# Altium PCB Load-Transient_Tool.PcbDoc
Units mm, origin at the board's own origin, x right, y up, seen from the top; angles counter-clockwise.
Board outline 69.98 x 49.4 mm, 2 copper layers (Top Layer, Bottom Layer); 42 components, 23 nets, 108 pads, 63 vias.
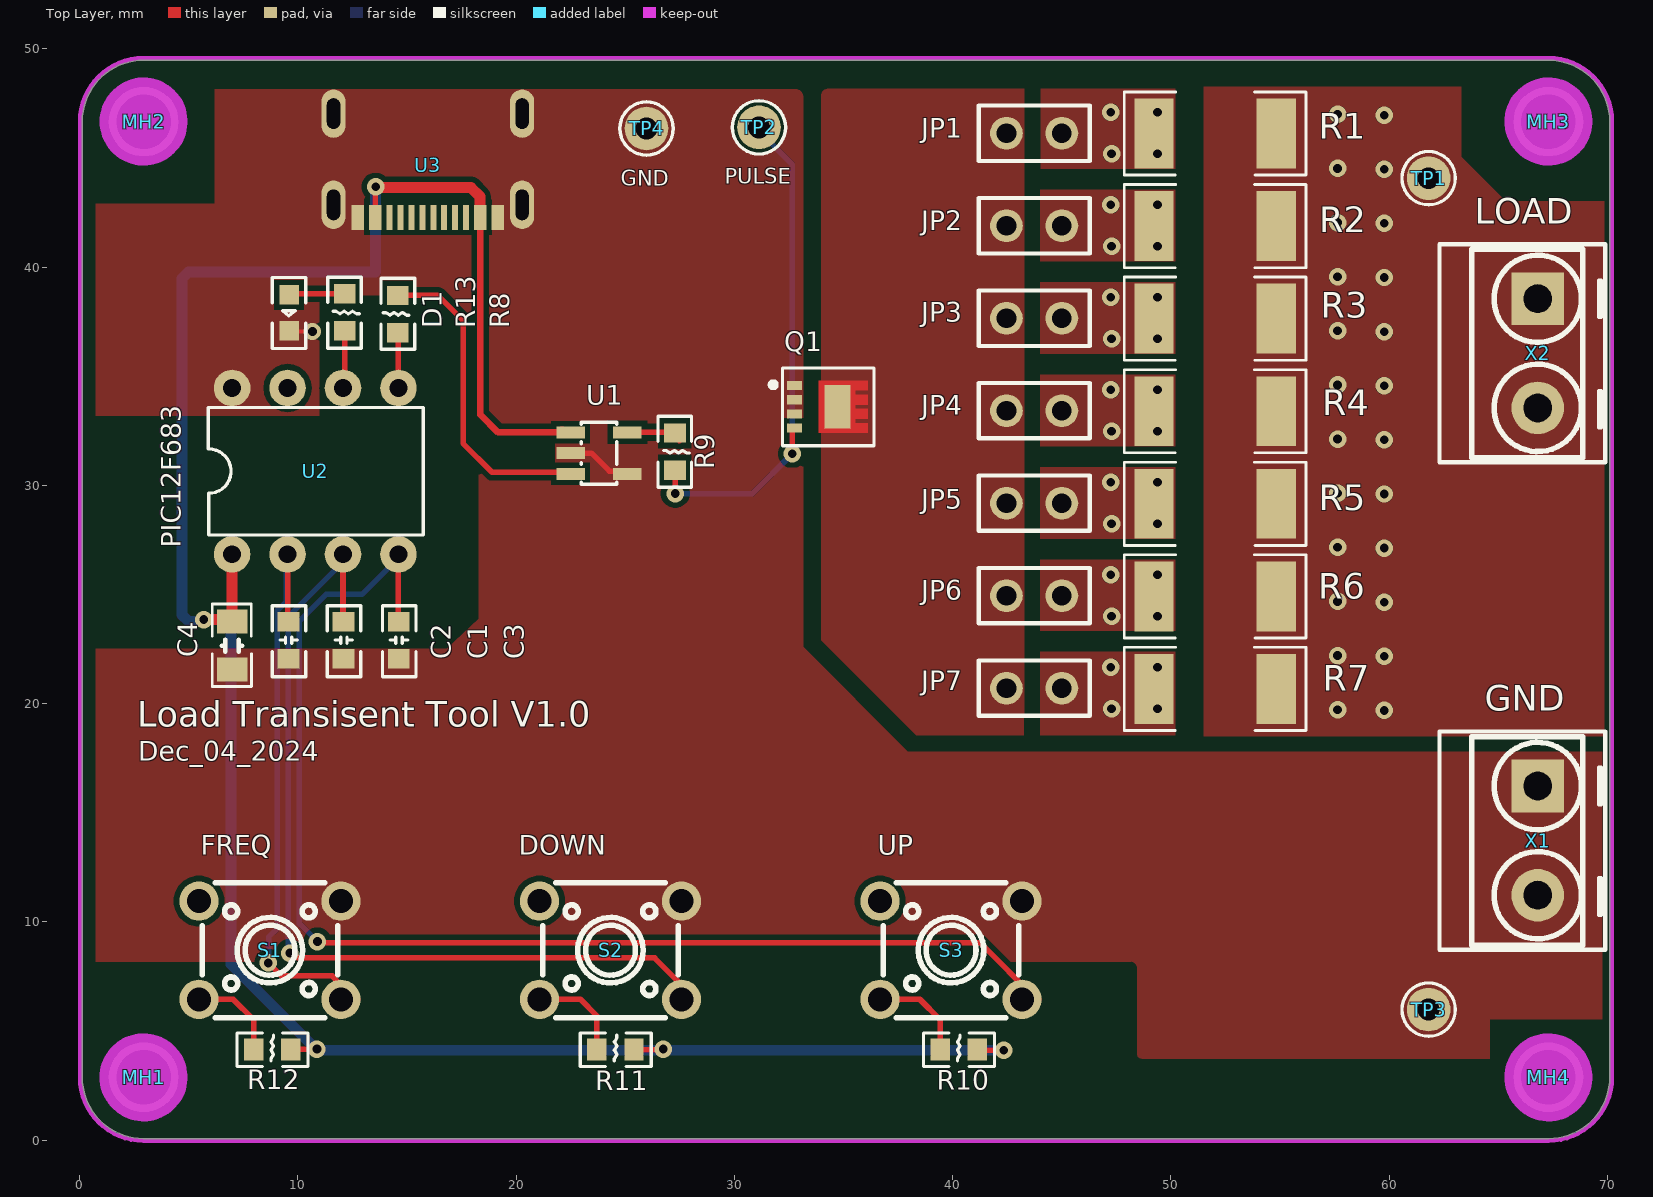
[diagram p0: Top Layer view]
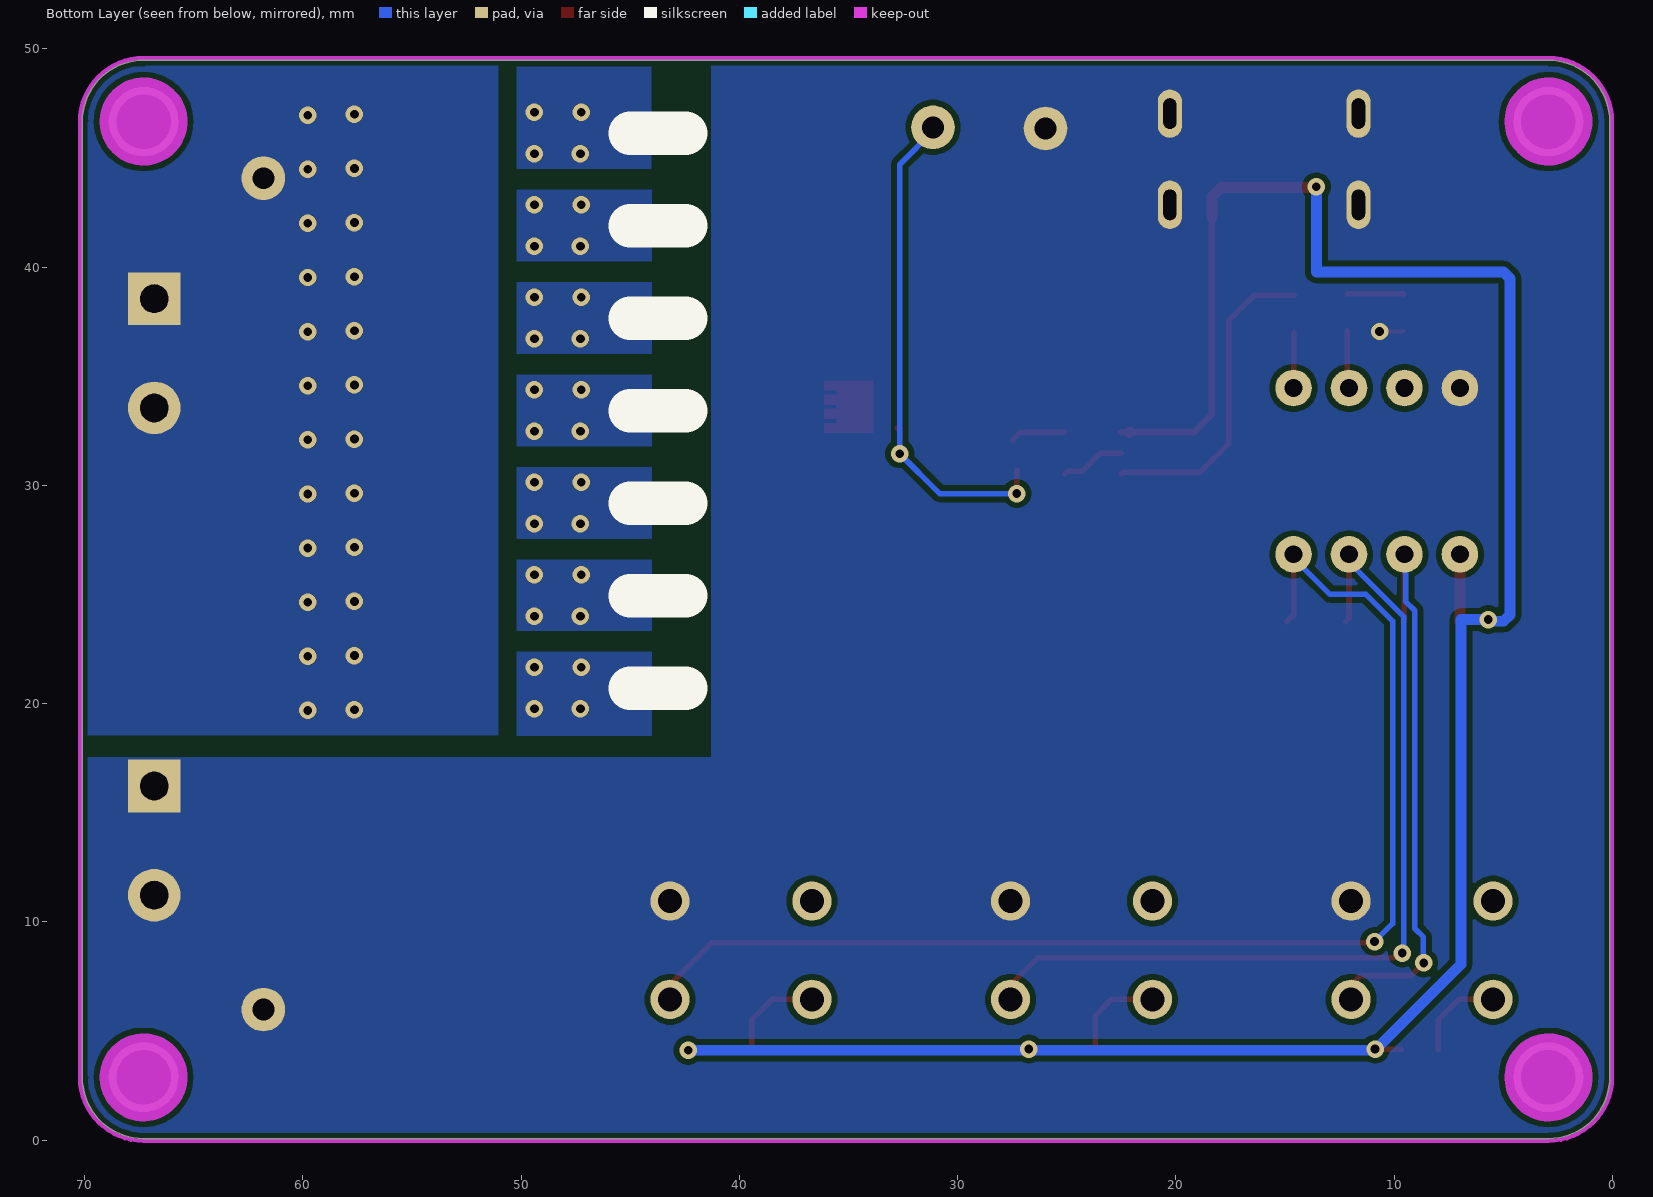
[diagram p1: Bottom Layer view, seen from below]
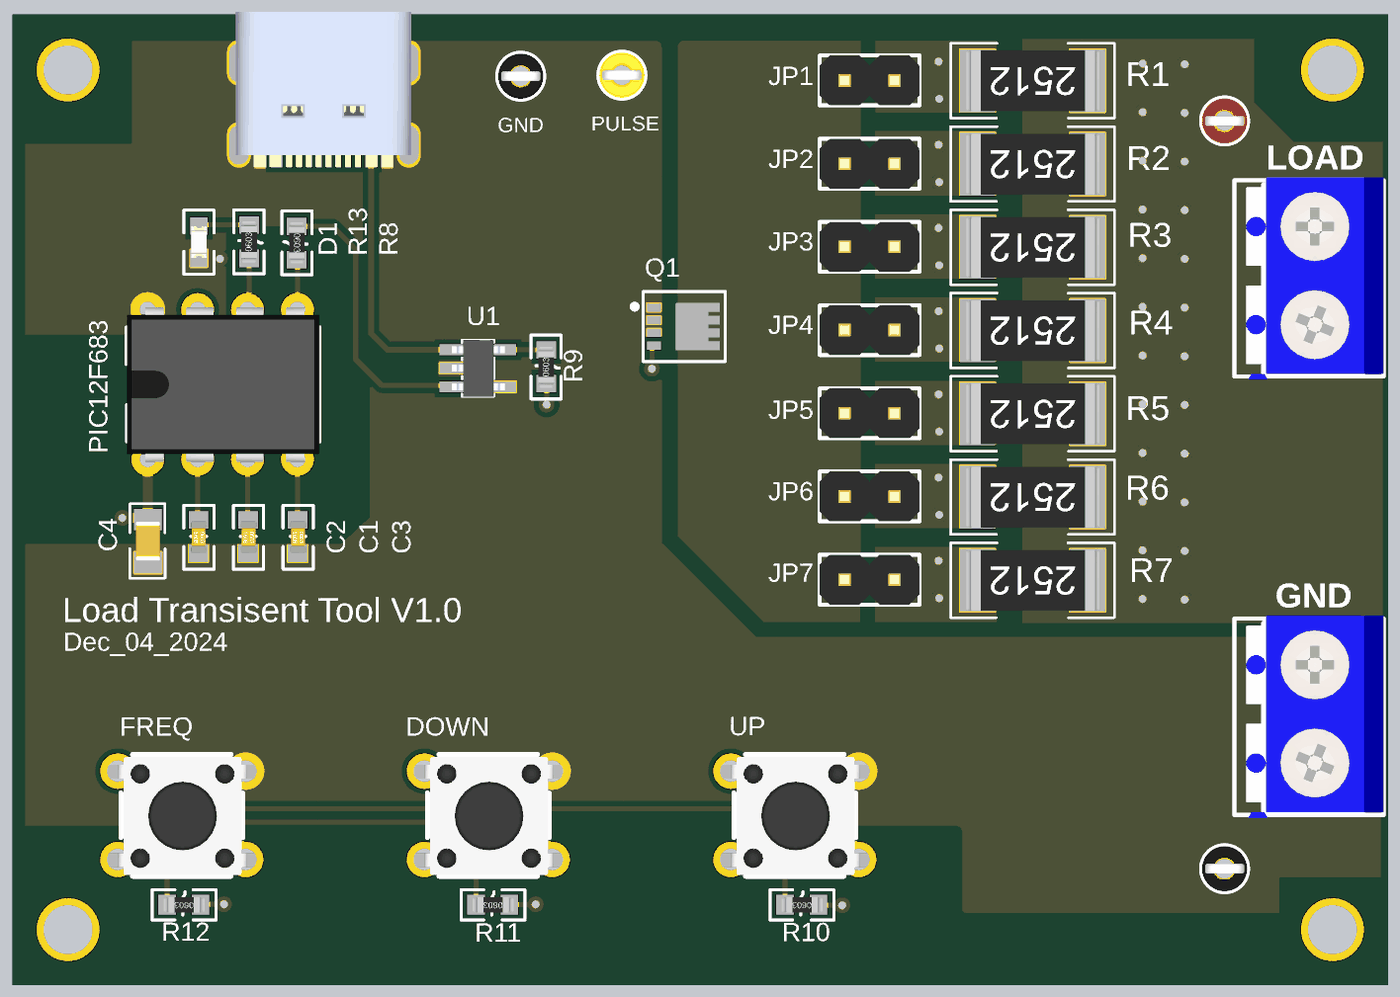
[diagram p2: 3D render of the assembled board from above, using the file's embedded part models]

## Layer stack, top to bottom
Top Solder: solder mask 0.0102, Solder Resist, Dk 3.5
Top Layer: signal copper 0.0356
Dielectric1: core 0.32, FR-4, Dk 4.8
Bottom Layer: signal copper 0.0356
Bottom Solder: solder mask 0.0102, Solder Resist, Dk 3.5

## Board outline
2.925,0.075 67.3,0.075 ccw(c67.3,2.875) 70.1,2.875 70.1,46.675 ccw(c67.3,46.675) 67.3,49.475 2.925,49.475 ccw(c2.925,46.675) 0.125,46.675 0.125,2.875 ccw(c2.925,2.875)

## Design rules (kind name [scope] priority, off if disabled: settings)
Clearance "Pad-Pad Clearance Same Net" [IsPad vs IsPad] p1 off: gap=0.1 ignorepadtopadclearanceinfootprint=FALSE except(0: Arc-Hole Track-Hole SMDPad-Hole THPad-Hole Via-Hole Fill-Hole Poly-Hole Region-Hole Text-Hole)
Clearance "General Clearance" [All] p2: gap=0.254 ignorepadtopadclearanceinfootprint=FALSE
ComponentClearance [All] p1 off: gap=0.2 collisioncheckmode=3 verticalgap=0.254 showdistances=FALSE
DiffPairsRouting [All] p1: maxlimit=0.127 minlimit=0.127 mostfreqgap=0.127 toplayer_minwidth=0.381 toplayer_maxwidth=0.381 toplayer_prefwidth=0.381 bottomlayer_minwidth=0.381 bottomlayer_maxwidth=0.381 bottomlayer_prefwidth=0.381 maxuncoupledlength=5.08
FabricationTestPointUsage TestPointUsage [All] p1 off: valid=0 allowmultiple=FALSE
FabricationTestpoint Testpoint [All] p1 off: side=3 testpointundercomponent=TRUE minsize=1.016 maxsize=2.54 preferedsize=1.524 minholesize=0 maxholesize=1.016 preferedholesize=0.813 testpointgrid=0.025 allowsidetop=TRUE allowsidebottom=TRUE usegrid=TRUE gridtolerance=0
HoleSize [All] p1: absolutevalues=TRUE maxlimit=5.2 minlimit=0.2 maxpercent=80.000 minpercent=20.000
MatchedLengths DiffPair_MatchedLengths [(IsDifferentialPair And (Name = 'DIFF_RX1'))] p1: tolerance=25.4 checknetsindiffpair=TRUE checkdiffpairvsdiffpair=FALSE checkxsignals=FALSE checkothers=FALSE
MinimumAnnularRing [All] p1: minimumring=0.12
PlaneClearance [All] p1: clearance=0.3
PlaneConnect [All] p1: planeconnectstyle=Direct reliefexpansion=0.5 reliefentries=4 reliefconductorwidth=0.25 reliefairgap=0.25
PolygonConnect [IsPAD] p1: connectstyle=Direct reliefconductorwidth=0.3 reliefentries=4 polygonreliefangle="90 Angle" airgapwidth=0.254
RoutingLayers [All] p1: top layer_v5=FALSE bottom layer_v5=FALSE
RoutingVias [All] p1: holewidth=0.3 width=0.6 viastyle="Through Hole" minholewidth=0.3 minwidth=0.6 maxholewidth=0.5 maxwidth=0.9
ShortCircuit ShortCircuit_1 [Net = 'No Net' vs Net = 'No Net'] p1: allowed=TRUE
ShortCircuit [All] p2: allowed=FALSE
SilkToSolderMaskClearance SilkscreenOverComponentPads [IsPad] p1: minsilkscreentomaskgap=0.254 clearancetoexposedcopper=TRUE
SolderMaskExpansion SolderMaskExpansion_Vias [IsVia] p1: expansion=-0.65 istentingtop=FALSE
SolderMaskExpansion [All] p2: expansion=0.051 istentingtop=FALSE
SupplyNets "Schematic Supply Nets_1" [InNet('GND')] p1: voltage=0.000
SupplyNets "Schematic Supply Nets" [InNet('5VDD')] p2: voltage=0.000
Width [All] p1: maxlimit=2.5 minlimit=0.127 preferedwidth=0.127
20 further rules are at their usual default settings.

## Components (designator, comment, footprint, x,y, rotation, side; value= is the part's Value field where it differs from the comment)
C1 "4.7nF" C0603 12.1,22.9 r270 top
C2 "4.7nF" C0603 9.575,22.9 r270 top
C3 "4.7nF" C0603 14.625,22.9 r270 top
C4 "N.C" C0805 6.975,22.675 r270 top
D1 "LED" CHIPLED_0603 9.6,37.9 r180 top
JP1 "Jumper, 2-Pin" JUMPER-2PIN 42.474,46.125 r0 top
JP2 "Jumper, 2-Pin" JUMPER-2PIN 42.474,41.888 r0 top
JP3 "Jumper, 2-Pin" JUMPER-2PIN 42.474,37.651 r0 top
JP4 "Jumper, 2-Pin" JUMPER-2PIN 42.474,33.414 r0 top
JP5 "Jumper, 2-Pin" JUMPER-2PIN 42.474,29.177 r0 top
JP6 "Jumper, 2-Pin" JUMPER-2PIN 42.474,24.939 r0 top
JP7 "Jumper, 2-Pin" JUMPER-2PIN 42.474,20.702 r0 top
MH1 "MOUNTING_HOLE_2MM" MOUNTINGHOLE_2.5_PLATED 2.933,2.883 r0 top
MH2 "MOUNTING_HOLE_2MM" MOUNTINGHOLE_2.5_PLATED 2.933,46.667 r0 top
MH3 "MOUNTING_HOLE_2MM" MOUNTINGHOLE_2.5_PLATED 67.292,46.667 r0 top
MH4 "MOUNTING_HOLE_2MM" MOUNTINGHOLE_2.5_PLATED 67.292,2.883 r0 top
Q1 "TPH3R704PL,L1Q" POWERDI3333-8_L3.3-W3.3-P0.65-BL 33.725,33.6 r270 top
R1 "0.5Ω" R2512 52.025,46.117 r180 top
R2 "1Ω" R2512 52.025,41.877 r180 top
R3 "2.2Ω" R2512 52.025,37.637 r180 top
R4 "3.3Ω" R2512 52.025,33.396 r180 top
R5 "4.7Ω" R2512 52.025,29.156 r180 top
R6 "10Ω" R2512 52.025,24.915 r180 top
R7 "22Ω" R2512 52.025,20.675 r180 top
R8 "470Ω" R0603 14.575,37.85 r270 top
R9 "47Ω" R0603 27.275,31.55 r90 top
R10 "4.7kΩ" R0603 40.275,4.15 r180 top
R11 "4.7kΩ" R0603 24.55,4.15 r180 top
R12 "4.7kΩ" R0603 8.825,4.15 r180 top
R13 "1kΩ" R0603 12.15,37.925 r90 top
S1 "DTSM-61-NR" KEY-TH_4P-L6.2-W6.2-P4.50-LS6.5 8.723,8.706 r180 top
S2 "DTSM-61-NR" KEY-TH_4P-L6.2-W6.2-P4.50-LS6.5 24.324,8.706 r180 top
S3 "DTSM-61-NR" KEY-TH_4P-L6.2-W6.2-P4.50-LS6.5 39.925,8.706 r180 top
TP1 "TP" TP_TH_1MM_RED 61.802,44.073 r0 top
TP2 "TP" TP_TH_1MM_YELLOW 31.125,46.401 r0 top locked
TP3 "TP" TP_TH_1MM_BLACK 61.802,5.985 r0 top
TP4 "TP" TP_TH_1MM_BLACK 25.975,46.35 r0 top locked
U1 "UCC27517DBVR" SOT23-5L 23.8,31.475 r270 top
U2 "PIC12F683" DIL08-ROUND 10.8,30.65 r0 top locked
U3 "USB C" USB_C_CUSB31-CFM2AX-01-X 15.955,45.822 r180 top
X1 "Terminal Block 3.5mmPitch: 3,5 mmNumber of pins: 2Created by Rembrandt Electronicswww.rembrandtelectronics.com" SCREWTERMINAL-5MM-2 66.8,16.225 r270 top
X2 "Terminal Block 3.5mmPitch: 3,5 mmNumber of pins: 2Created by Rembrandt Electronicswww.rembrandtelectronics.com" SCREWTERMINAL-5MM-2 66.8,38.55 r270 top

## Footprints (in the part's own frame and the unit in brackets; to place one, negate y for a bottom-side part, rotate by r counter-clockwise, add the part's x,y. Pads: shape width x height; smd on the part's side, far side on the other; paste and mask are expansions set on the pad)
C0603 [mm]
  rect 0.889x1 smd: 1(-0.85,0) 2(0.85,0)
  silkscreen extent -1.59,-0.75 1.66,0.79, body extent -0.77,-0.38 0.83,0.42, height 0.8
C0805 [mm]
  rect 1.1x1.4 smd: 1(-1.098,0.025) 2(1.102,0.025)
  silkscreen extent -1.89,-0.9 1.89,0.9, body extent -1,-0.6 1,0.65, height 0.85
CHIPLED_0603 [mil]
  rect 35x35 smd: A(0,-32.5) C(0,32.5)
  silkscreen extent -30,-64 31,64, body extent -16,-31 16,31, height 22
DIL08-ROUND [mil]
  round 65.98 hole 32: 1(-150,-150)
  oval 66x65.98 / inner round 65.98 / far side round 65.98 hole 32: 2(-50,-150) 3(50,-150) 4(150,-150) 5(150,150) 6(50,150) 7(-50,150) 8(-150,150)
  silkscreen extent -193,-115 195,115, body extent -192,-155 194,155, height 189
JUMPER-2PIN [mm]
  round 1.5 hole 0.9: 1(-0.011,0.007) 2(2.529,0.007)
  silkscreen extent -1.28,-1.26 3.8,1.28, body extent -1.28,-1.26 3.8,1.28, height 8.54
KEY-TH_4P-L6.2-W6.2-P4.50-LS6.5 [mm]
  round 1.8 hole 1.1: 1(3.251,-2.25) 2(-3.251,-2.25) 3(3.251,2.25) 4(-3.251,2.25)
  silkscreen extent -3.1,-3.1 3.1,3.1, body extent -3.99,-2.96 3.91,3.04, height 5
MOUNTINGHOLE_2.5_PLATED [mm] "MOUNTINGHOLE_2.5_PLATED"
  round 3.2 hole 2.5: MOUNT(0,0)
  Top Layer keep-out circle w2.032: c0,0 r1
  Top Layer keep-out circle w2.032: c0,0 r1
  Bottom Layer keep-out circle w2.032: c0,0 r1
  Bottom Layer keep-out circle w2.032: c0,0 r1
POWERDI3333-8_L3.3-W3.3-P0.65-BL [mm]
  rect 0.42x0.7 smd: 1(0.975,-0.97) 2(-0.975,-0.97) 2(-0.325,-0.97) 2(0.325,-0.97)
  rect 2x1.2 smd: 3(0,1)
  Top Layer region: -1.2,0.14 -1.2,2.39 -0.75,2.39 -0.75,1.8 -0.55,1.8 -0.55,2.39 -0.1,2.39 -0.1,1.8 0.1,1.8 0.1,2.39 0.55,2.39 0.55,1.8 0.75,1.8 0.75,2.39 1.2,2.39 1.2,0.14
  silkscreen extent -1.78,-2.07 1.78,2.67, body extent -1.43,-0.97 1.47,2.09, height 0.7
R0603 [mm]
  rect 0.889x1 smd: 1(-0.85,0) 2(0.85,0)
  silkscreen extent -1.64,-0.76 1.61,0.77, body extent -1.07,-0.39 1.03,0.41, height 0.5
R2512 [mm]
  rect 1.8x3.2 smd: 1(-2.8,0) 2(2.8,0)
  silkscreen extent -4.17,-1.91 4.17,1.91, body extent -3.43,-1.54 3.37,1.56, height 0.6
SCREWTERMINAL-5MM-2 [mil]
  rect 95x95 hole 51.18 slot 51.38 at 0 deg paste-99999 mask+2: 1(0,0)
  round 95 hole 51.18 slot 51.38 at 0 deg paste-99999 mask+2: 2(196.85,0)
  silkscreen extent -98,-177 295,122, body extent -104,-177 301,122, height 394
SOT23-5L [mm]
  rect 0.55x1.3 smd: 1(-0.95,-1.3) 2(0,-1.3) 3(0.95,-1.3) 4(0.95,1.3) 5(-0.95,1.3)
  silkscreen extent -1.42,-0.81 1.42,0.81, body extent -1.45,-1.33 1.45,1.37, height 1.45
TP_TH_1MM_BLACK [mm]
  round 2 hole 1: 1(0,0)
  silkscreen extent -1.22,-1.22 1.22,1.22, body extent -1.15,-1.15 1.15,1.15, height 5
TP_TH_1MM_RED [mm]
  round 2 hole 1: 1(0,0)
  silkscreen extent -1.22,-1.22 1.22,1.22, body extent -1.15,-1.15 1.15,1.15, height 5
TP_TH_1MM_YELLOW [mm]
  round 2 hole 1: 1(0,0)
  silkscreen extent -1.22,-1.22 1.22,1.22, body extent -1.15,-1.15 1.15,1.15, height 5
USB_C_CUSB31-CFM2AX-01-X [mm] "USB_C_CUSB31-CFM2AX-01-X"
  rect 0.575x1.15 smd: A1B12(-3.2,3.545) A4B9(-2.4,3.545) B1A12(3.2,3.545) B4A9(2.4,3.545)
  rect 0.275x1.15 smd: A5(-1.25,3.545) A6(-0.25,3.545) A7(0.25,3.545) A8(1.25,3.545) B5(1.75,3.545) B6(0.75,3.545) B7(-0.75,3.545) B8(-1.75,3.545)
  oval 1.108x2.216 hole 0.6 slot 1.4 at 90 deg: M1(-4.32,2.97) M2(4.32,2.97) M3(-4.32,-1.21) M4(4.32,-1.21)
  body extent -4.45,-3.8 4.49,4.1, height 3.18

## Part data
C1 C2 C3: library part Cap_0603, "Capacitor, X5R, ±10%, 6.3V", Manufacturer=N.A., Part Number=C0603-N.C., Volts=6.3V, Artikkelnr Noca=20069060, Artikkelnr Simpro=N.A., Footprint Doc=0603, LatestRevisionDate=2009-11-23, Manufacturer Part Number=N.A., Pin Count=2, Published=2009-05-08, Publisher="Nordic Semiconductor"
C4: library part Cap_0805, "Capacitor, X5R, ±10%, 6.3V", Manufacturer=N.A., Specification="X7R, ±10%, 16V"
D1: library part LEDCHIP-LED0603, "SMD lamp beads"
JP1 JP2 JP3 JP4 JP5 JP6 JP7: library part "Jumper, 2-Pin_TH"
MH1 MH2 MH3 MH4: library part MOUNTING_HOLE_2.5MM_PLATED
Q1: library part MOSFET-TPH3R704PL_1, "N Channel Mosfet 40V 92A dfn-8"
R1 R2 R3 R4 R5 R6 R7: library part Res_2512, "Resistor", Specification=±1%
R8 R9 R10 R11 R12 R13: library part Res_0603, "Resistor, ±1%, 0.100W", Manufacturer=N.A., Part Number=R0603-N.C.Ω, Artikkelnr Noca=N.A., Artikkelnr Simpro=N.A., Footprint Doc=0603, LatestRevisionDate=2009-05-08, Manufacturer Part Number=N.A., Note="Chip Res", Pin Count=2, Published=2009-05-08, Publisher="Nordic Semiconductor"
S1 S2 S3: library part "SW B3FS", "SPNA SMD Keyboard Switch"
TP1 TP2 TP3 TP4: library part TESTPAD_TH, "Testpoint, through hole", Part Number="Testpoint TH", Artikkelnr Noca=N.A., Artikkelnr Simpro=N.A., Footprint Doc=TESTPAD-TH, LatestRevisionDate=2009-12-12, Pin Count=1, Published=2009-12-12, Publisher="Nordic Semiconductor"
U1: "Gate Drive ICs ROHS", Name=UCC27517DBVR
U3: library part USB_C, "USB Type-C USB 2.0 Connector", DeviceSetName=USB_C, GateName_1=G$1, LibraryName=adafruit_connector, SymbolName_1=USB_C
X1 X2: library part SCREWTERMINAL-H2-5.0, GateName_1=-1, SymbolName_1=TERMINAL-BLOCK-PIN-3.5MM
U2: Name=PIC12F683

## Via types
v1: diameter 0.8, hole 0.4, Top Layer to Bottom Layer, tented both sides, 63 vias

## Nets (pads, with @x,y where several pads share a name; then routed paths per layer and width w, separated by ;. In a path a pad name is that pad's centre, name@x,y a point inside that pad or via, vN(x,y) a via of type N, cw(c..) or ccw(c..) an arc to the next point about the centre after c; other vN are vias at no path point)
5VDD: C4.1 R10.1 R11.1 R12.1 U1.1 U2.1 U3.A4B9 U3.B4A9 | length 112.5
  Top Layer w0.254: R12.1 9.7,4.175 v1(10.875,4.175) ; U3.B4A9@13.5,42.155 13.55,42.155 v1@13.55,43.475 ; R11.1@25.44,4.15 v1@26.74,4.15 ; R10.1@41.125,4.125 41.127,4.123 v1(42.341,4.123)
  Top Layer w0.3: U3.A4B9 18.355,33.245 19.175,32.425 22.125,32.425 U1.1
  Top Layer w0.5: v1(5.695,23.852) C4.1@6.99,23.852 ; U2.1 C4.1@6.99,23.852 ; C4.1 6.99,23.773 C4.1@6.99,23.852 ; v1(13.566,43.674) 13.59,43.65 17.925,43.65 18.347,43.228 18.347,42.285 U3.A4B9 ; U1.1@22.1,32.45 U1.1@22.125,32.425
  Bottom Layer w0.5: v1(13.566,43.674) 13.566,39.775 4.993,39.775 4.7,39.482 4.7,24.069 4.993,23.776 5.407,23.776 5.426,23.794 5.638,23.794 v1(5.695,23.852) 6.936,23.852 6.936,8.062 10.875,4.123 v1(42.341,4.123)
  other v1: 26.74,4.176
BTN1: C2.1 S1.4 U2.2 | length 27
  Top Layer w0.254: v1(8.652,8.123) 9.249,7.526 11.569,7.526 12.635,6.46 S1.4@12.735,6.46 ; U2.2 9.53,23.795 C2.1
  Bottom Layer w0.254: v1(8.652,8.123) 8.658,8.129 8.658,9.308 9.059,9.709 9.059,24.259 9.475,24.675 9.475,26.785 U2.2
BTN2: C1.1 S2.4 U2.3 | length 42.1
  Top Layer w0.254: v1(9.625,8.575) 9.773,8.575 9.998,8.35 26.346,8.35 28.236,6.46 S2.4@28.336,6.46 ; U2.3 12.07,23.905 C1.1@12.225,23.75
  Bottom Layer w0.145: U2.3@12.016,26.441 12.07,26.495 U2.3
  Bottom Layer w0.254: v1(9.625,8.575) 9.567,8.633 9.567,23.992 U2.3@12.016,26.441
BTN3: C3.1 S3.4 U2.4 | length 58.2
  Top Layer w0.254: v1@10.9,9.05 41.247,9.05 43.837,6.46 S3.4@43.937,6.46 ; C3.1@14.61,24.015 U2.4 ; C3.1@14.66,24.015 C3.1@14.925,23.75
  Bottom Layer w0.254: v1(10.9,9.1) 10.075,9.925 10.075,23.782 11.299,25.006 12.938,25.006 14.61,26.678 U2.4
GND: C1.2 C2.2 C3.2 C4.2 D1.C Q1.2 S1.2 S2.2 S3.2 TP3.1 TP4.1 U1.2 U1.4 U2.8 U3.A1B12 U3.B1A12 U3.M1 U3.M2 U3.M3 U3.M4 X1.1 X1.2 | length 4.1
  Top Layer w0.2: D1.C@9.575,37.075 9.601,37.049 v1(10.668,37.049)
  Top Layer w0.254: U1.2 23.45,31.475 24.272,30.653 24.972,30.653 U1.4
NetD1_A: D1.A R13.2 | length 2.6
  Top Layer w0.254: D1.A@9.575,38.775 9.575,38.726 9.625,38.775 R13.2
NetJP1_1: JP1.1 JP2.1 JP3.1 JP4.1 JP5.1 JP6.1 JP7.1 Q1.3
NetJP1_2: JP1.2 R1.2
  other v1: 47.277,45.195 49.384,45.195 47.244,47.093 49.384,47.093
NetJP2_2: JP2.2 R2.2
  other v1: 47.277,40.958 49.384,40.958 47.244,42.856 49.384,42.856
NetJP3_2: JP3.2 R3.2
  other v1: 47.277,36.721 49.384,36.721 47.244,38.619 49.384,38.619
NetJP4_2: JP4.2 R4.2
  other v1: 47.277,32.484 49.384,32.484 47.244,34.382 49.384,34.382
NetJP5_2: JP5.2 R5.2
  other v1: 47.277,28.247 49.384,28.247 47.244,30.145 49.384,30.145
NetJP6_2: JP6.2 R6.2
  other v1: 47.277,24.01 49.384,24.01 47.244,25.908 49.384,25.908
NetJP7_2: JP7.2 R7.2
  other v1: 47.277,19.773 49.384,19.773 47.244,21.671 49.384,21.671
NetQ1_1: Q1.1 R9.1 TP2.1 | length 24
  Top Layer w0.254: R9.1 27.289,30.686 v1(27.289,29.626) ; v1@32.546,31.554 v1(32.65,31.45) 32.65,32.625 Q1.1
  Bottom Layer w0.254: v1(27.289,29.626) 30.825,29.625 v1(32.65,31.45) 32.65,44.7 TP2.1@31.125,46.225
NetR1_1: R1.1 R2.1 R3.1 R4.1 R5.1 R6.1 R7.1 TP1.1 X2.1 X2.2
  other v1: 59.768,19.688 57.629,19.725 59.768,22.167 57.629,22.204 59.768,24.647 57.629,24.684 59.768,27.126 57.629,27.163 59.768,29.605 57.629,29.642 59.768,32.085 57.629,32.122 59.768,34.564 57.629,34.601 59.768,37.043 57.629,37.08 59.768,39.523 57.629,39.56 59.768,42.002 57.629,42.039 59.768,44.481 57.629,44.518 59.768,46.961 57.629,46.998
NetR8_1: R8.1 U1.3 | length 14.6
  Top Layer w0.254: R8.1 16.425,38.7 17.575,37.55 17.575,31.925 18.9,30.6 22.425,30.6 U1.3
NetR8_2: R8.2 U2.5 | length 2.6
  Top Layer w0.254: R8.2 14.61,36.965 U2.5
NetR9_2: R9.2 U1.5 | length 2.6
  Top Layer w0.254: U1.5 27.141,32.425 27.483,32.083 R9.2@27.483,32.042
NetR10_2: R10.2 S3.3 | length 5.3
  Top Layer w0.254: S3.3@35.927,6.46 38.49,6.46 39.425,5.525 R10.2@39.425,4.125
NetR11_2: R11.2 S2.3 | length 5.2
  Top Layer w0.254: S2.3@20.326,6.46 22.94,6.46 23.7,5.7 R11.2
NetR12_2: R12.2 S1.3 | length 5
  Top Layer w0.254: S1.3@4.725,6.46 7.04,6.46 7.975,5.525 R12.2
NetR13_1: R13.1 U2.6 | length 2.7
  Top Layer w0.254: U2.6 12.15,34.46 R13.1
pads on no net: MH1.MOUNT MH2.MOUNT MH3.MOUNT MH4.MOUNT S1.1 S2.1 S3.1 U2.7 U3.A5 U3.A6 U3.A7 U3.A8 U3.B5 U3.B6 U3.B7 U3.B8

## Polygon pours and split planes (outlines as drawn)
GND on Top Layer "NONET_L02_P-001" (solid, remove dead copper, pour order 20): 69.75,5.55 64.6,5.55 64.6,3.725 48.7,3.725 cw(c48.7,3.975) 48.45,3.975 48.45,7.875 ccw(c48.15,7.875) 48.15,8.175 0.75,8.175 0.75,22.525 16.825,22.525 18.3,23.9 18.3,31.2 18.925,30.575 21.8,30.575 21.8,32.45 21.775,32.425 19.175,32.425 18.35,33.25 18.35,36.775 16.424,38.701 10.975,38.701 10.975,33.2 0.75,33.2 0.75,42.9 6.2,42.9 6.2,48.15 32.8,48.15 cw(c32.8,47.8) 33.15,47.8 33.15,22.6 37.95,17.8 69.75,17.8
NetJP2_2 on Top Layer "NONET_L02_P-001" (solid, remove dead copper, pour order 31): 50.185,43.552 50.185,40.277 44.01,40.277 44.01,43.552
NetJP1_2 on Top Layer "NONET_L02_P-001" (solid, remove dead copper, pour order 30): 50.2,48.175 50.2,44.5 44.025,44.5 44.025,48.175
NetJP7_2 on Top Layer "NONET_L02_P-001" (solid, remove dead copper, pour order 29): 50.185,22.367 50.185,18.55 44.01,18.55 44.01,22.367
NetJP6_2 on Top Layer "NONET_L02_P-001" (solid, remove dead copper, pour order 28): 50.185,26.604 50.185,23.329 44.01,23.329 44.01,26.604
NetJP5_2 on Top Layer "NONET_L02_P-001" (solid, remove dead copper, pour order 27): 50.185,30.841 50.185,27.566 44.01,27.566 44.01,30.841
NetJP4_2 on Top Layer "NONET_L02_P-001" (solid, remove dead copper, pour order 26): 50.185,35.078 50.185,31.803 44.01,31.803 44.01,35.078
NetJP3_2 on Top Layer "NONET_L02_P-001" (solid, remove dead copper, pour order 25): 50.185,39.315 50.185,36.04 44.01,36.04 44.01,39.315
NetJP1_1 on Top Layer "NONET_L02_P-001" (solid, remove dead copper, pour order 19): 43.248,18.55 43.275,20.3 43.275,48.175 34.325,48.175 ccw(c34.325,47.82) 33.97,47.82 33.97,22.905 38.325,18.55
NetR1_1 on Top Layer "NONET_L02_P-001" (solid, remove dead copper, pour order 18): 70.1,18.5 70.1,30.932 70.1,43.014 65.336,43.014 63.3,45.05 63.3,48.25 51.5,48.25 51.5,18.5
NetJP7_2 on Bottom Layer "NONET_L02_P-001" (solid, remove dead copper, pour order 36): 50.185,22.367 50.185,18.527 44.01,18.527 44.01,22.367
NetJP6_2 on Bottom Layer "NONET_L02_P-001" (solid, remove dead copper, pour order 35): 50.185,26.604 50.185,23.329 44.01,23.329 44.01,26.604
NetJP5_2 on Bottom Layer "NONET_L02_P-001" (solid, remove dead copper, pour order 34): 50.185,30.841 50.185,27.566 44.01,27.566 44.01,30.841
NetJP4_2 on Bottom Layer "NONET_L02_P-001" (solid, remove dead copper, pour order 33): 50.185,35.078 50.185,31.803 44.01,31.803 44.01,35.078
NetJP3_2 on Bottom Layer "NONET_L02_P-001" (solid, remove dead copper, pour order 32): 50.185,39.315 50.185,36.04 44.01,36.04 44.01,39.315
NetJP2_2 on Bottom Layer "NONET_L02_P-001" (solid, remove dead copper, pour order 24): 50.185,43.552 50.185,40.277 44.01,40.277 44.01,43.552
NetJP1_2 on Bottom Layer "NONET_L02_P-001" (solid, remove dead copper, pour order 22): 50.2,49.181 50.2,44.5 44.025,44.5 44.025,49.181
NetR1_1 on Bottom Layer "NONET_L02_P-001" (solid, remove dead copper, pour order 23): 51.05,49.226 51.05,18.55 70,18.55 70,49.226
GND on Bottom Layer "NONET_L02_P-001" (solid, remove dead copper, pour order 21): 0.914,49.226 41.275,49.226 41.275,17.55 70,17.55 70,0.2 0.239,0.2 0.239,48.549 0.914,49.304

## Keep-outs
Keep-Out Layer:
  lines w0.2: 0.025,2.875 ccw(c2.925,2.875) 2.925,-0.025 ; 0.025,2.875 0.025,46.675 ; 0.025,2.875 0.025,2.875 ; 0.025,2.875 0.025,2.875 ; 0.025,46.675 cw(c2.925,46.675) 2.924,49.575 ; 0.025,46.675 0.025,46.675 ; 0.025,46.675 0.025,46.675 ; 2.924,49.575 cw(c2.925,49.475) 2.925,49.575 ; 2.924,49.575 cw(c2.925,46.675) 2.925,49.575 ; 2.925,-0.025 ccw(c2.925,0.075) 2.925,-0.025 ; 2.925,-0.025 ccw(c2.925,0.075) 2.925,-0.025 ; 2.925,-0.025 67.3,-0.025 ccw(c67.3,2.875) 70.2,2.874 ; 2.925,-0.025 2.925,-0.025 ; 2.925,-0.025 2.925,-0.025 ; 2.925,49.575 67.3,49.575 ; 67.301,49.575 ccw(c67.3,46.675) 67.3,49.575 ; 67.301,49.575 cw(c67.3,46.675) 70.2,46.676 ; 67.301,49.575 ccw(c67.3,49.475) 67.3,49.575 ; 70.2,2.874 ccw(c70.1,2.875) 70.2,2.875 ; 70.2,2.874 ccw(c67.3,2.875) 70.2,2.875 ; 70.2,2.875 70.2,46.675 ; 70.2,46.675 ccw(c70.1,46.675) 70.2,46.676 ; 70.2,46.675 ccw(c67.3,46.675) 70.2,46.676

## Silkscreen, mask and mechanical layers (free items; w line width, h text height)
Top Overlay:
  text "PULSE" at 29.563,43.578 h1.2
  text "GND" at 24.796,43.502 h1.2
  text "LOAD" at 63.908,41.603 h2
  text "PIC12F683" at 4.933,27.15 h1.52 r90
  text "GND" at 64.377,19.295 h2
  text "Load Transisent Tool V1.0" at 2.644,18.556 h2
  text "Dec_04_2024" at 2.69,17.086 h1.52
  text "UP" at 36.574,12.788 h1.52
  text "FREQ" at 5.56,12.771 h1.52
  text "DOWN" at 20.126,12.771 h1.52
Bottom Overlay:
  lines w2: 42.463,20.709 45.003,20.709 ; 42.463,24.946 45.003,24.946 ; 42.463,29.184 45.003,29.184 ; 42.463,33.421 45.003,33.421 ; 42.463,37.658 45.003,37.658 ; 42.463,41.895 45.003,41.895 ; 42.463,46.132 45.003,46.132
Bottom Solder:
  rectangle: 46.025,18.5 60.65,49.2
6. FabNotes:
  drawing of 709 lines, arcs and shapes, not listed
  text "NB2DSK-SPK01" at 155.04,133.672 h1.14
  text "DESIGN INFORMATION" at 98.801,133.652 h1.14
  text "BOARD NAME:" at 136.393,133.652 h1.14
  text "BOARD TECHNOLOGY" at 98.801,131.112 h1.14
  text "BOARD SIZE (REFER ALSO PROFILING INFORMATION)" at 147.061,131.112 h1.14
  text "10" at 100.922,128.923 h1.14
  text "269.6mm" at 149.781,128.838 h1.14
  text "10" at 114.6,128.75 h1.14
  text "74.6mm" at 172.781,128.738 h1.14
  text "10" at 128.57,128.623 h1.14
  text "X" at 165.73,128.064 h1.14
  text "(MIN. TRACK/   PADS  /   CLEARANCE     IN 0.001'')" at 97.277,126.032 h1.14
  text "MINIMUM ANNULAR RING 0.05MM (0.002'') EXTERNAL PER IPC-2221 CLASS 3 LEVEL C AND IS TH" at 98.801,123.492 h1.14
  text "MANUFACTURING REGISTRATION ALLOWANCE" at 98.801,121.206 h1.14
  text "LAND SIZE CALCULATION MINIMUM - NOMINAL HOLE SIZE + 0.508MM (0.020'')" at 98.801,118.412 h1.14
  text "X" at 136.393,114.094 h1.14
  text "X" at 154.173,114.094 h1.14
  text "CIRCUIT TYPE:" at 98.801,113.84 h1.14
  text "SS" at 121.661,113.84 h1.14
  text "DS" at 139.441,113.84 h1.14
  text "PTH" at 157.221,113.84 h1.14
  text "ML" at 168.143,113.84 h1.14
  text "No. of Layers" at 175.001,113.84 h1.14
  text "FINGER CONNECTOR DIM PER:" at 98.801,110.792 h1.14
  text "AS SHOWN" at 175.001,110.792 h1.14
  text "No. OFF TOTAL" at 115.565,107.998 h1.14
  text "ONE SIDE" at 157.221,107.998 h1.14
  text "BOTH SIDES" at 175.001,107.744 h1.14
  text "X" at 136.393,105.204 h1.14
  text "X" at 107.09,105.1 h1.14
  text "VIAS:" at 98.801,105.077 h1.14
  text "NONE" at 110.231,105.077 h1.14
  text "FEED THRU'" at 121.661,105.077 h1.14
  text "TENTED" at 139.441,105.077 h1.14
  text "BURIED LAYER SEQUENCE" at 157.221,105.077 h1.14
  text "X" at 118.486,102.156 h1.14
  text "UNIQUE DRILL" at 121.661,102.029 h1.14
  text "2 SIZE" at 139.441,102.029 h1.14
  text "BLIND LAYER SEQUENCE" at 157.221,102.029 h1.14
  text "Layer Stack Manager (PCB)" at 134.234,99.743 h1.14
  text "X" at 171.953,99.743 h1.14
  text "AS SHOWN" at 175.001,99.743 h1.14
  text "LAYER CONSTRUCTION PER:" at 98.801,99.616 h1.14
  text "Altium Designer 6.6" at 174.84,96.957 h1.14
  text "ARTWORK:" at 98.801,96.822 h1.14
  text "MANUAL" at 121.661,96.822 h1.14
  text "DIGITISED" at 139.441,96.822 h1.14
  text "X" at 154.173,96.822 h1.14
  text "CAD" at 157.221,96.822 h1.14
  text "TYPE" at 168.143,96.822 h1.14
  text "ARTWORK/PATTERN MASTER LIST" at 98.801,92.123 h1.14
  text "DESCRIPTION" at 100.071,89.71 h1.14
  text "DRAWING No./CAD FILE REF." at 118.74,89.71 h1.14
  text "LAYER NAME" at 160.015,89.71 h1.14
  text "GERBER FILE REF" at 180.767,89.634 h1.14
  text "PCB FILE" at 98.547,87.17 h1.14
  text "NB2DSK-SPK.PCBDOC" at 118.906,87.113 h1.14
  text "PcbDoc" at 150.16,87.094 h1.14
  text "Top Paste Mask" at 158.339,84.63 h1.14
  text "NB2DSK-SPK" at 119.033,84.573 h1.14
  text "GTP" at 151.34,84.581 h1.14
  text "GTP" at 200.96,84.554 h1.14
  text "GERBER FILE" at 98.547,84.503 h1.14
  text "GTO" at 151.34,82.081 h1.14
  text "GTO" at 200.909,82.065 h1.14
  text "NB2DSK-SPK" at 119.033,82.033 h1.14
  text "Top Overlay" at 158.339,82.039 h1.14
  text "GERBER FILE" at 98.547,81.963 h1.14
  text "Top Solder Mask" at 158.339,79.601 h1.14
  text "GTS" at 151.34,79.581 h1.14
  text "NB2DSK-SPK" at 119.033,79.493 h1.14
  text "GTS" at 200.96,79.474 h1.14
  text "GERBER FILE" at 98.547,79.423 h1.14
  text "TOP LAYER" at 158.339,77.01 h1.14
  text "NB2DSK-SPK" at 119.033,76.953 h1.14
  text "GTL" at 200.96,76.934 h1.14
  text "GERBER FILE" at 98.547,76.883 h1.14
  text "GTL" at 151.34,76.881 h1.14
  text "NB2DSK-SPK" at 119.033,69.46 h1.14
  text "BOTTOM LAYER" at 157.958,69.39 h1.14
  text "GBL" at 150.959,69.317 h1.14
  text "GBL" at 200.579,69.314 h1.14
  text "GERBER FILE" at 98.166,69.263 h1.14
  text "GBS" at 150.959,66.917 h1.14
  text "Bottom Solder Mask" at 157.958,66.901 h1.14
  text "NB2DSK-SPK" at 119.033,66.793 h1.14
  text "GBS" at 200.579,66.774 h1.14
  text "GERBER FILE" at 98.166,66.723 h1.14
  text "GBO" at 150.959,64.317 h1.14
  text "Bottom Overlay" at 157.958,64.31 h1.14
  text "NB2DSK-SPK" at 119.033,64.253 h1.14
  text "GBO" at 200.579,64.234 h1.14
  text "GERBER FILE" at 98.166,64.183 h1.14
  text "GBP" at 200.579,61.821 h1.14
  text "Bottom Paste Mask" at 157.958,61.77 h1.14
  text "NB2DSK-SPK" at 119.033,61.713 h1.14
  text "GBP" at 150.959,61.721 h1.14
  text "GERBER FILE" at 98.039,61.643 h1.14
  text "APERTURE LIST" at 98.547,41.457 h1.14
  text "APR" at 151.16,41.381 h1.14
  text "DRILL REPORT" at 98.547,38.917 h1.14
  text "DRR" at 151.16,38.841 h1.14
  text "DRILL FILE" at 98.281,36.31 h1.14
  text "DRL" at 151.035,36.166 h1.14
  text "TXT" at 150.881,33.76 h1.14
  text "EXCELLON DRILL" at 98.206,33.685 h1.14
  text "MATERIAL:" at 98.801,28.48 h1.14
  text "GLASS FIBRE EPOXY RESIN NEMA GRADE FR4-08 (IPC-4101) - WITH TG170" at 124.455,28.226 h1.14
  text "X" at 121.788,28.099 h1.14
  text "THICKNESS:" at 106.675,25.305 h1.14
  text "0.8mm" at 124.455,25.305 h1.14
  text "1.2mm" at 142.108,25.305 h1.14
  text "1.6mm" at 159.761,25.305 h1.14
  text "2.4mm" at 177.541,25.305 h1.14
  text "3.2mm" at 195.321,25.305 h1.14
  text "X" at 157.348,25.178 h1.14
  text "2" at 153.499,22.41 h1.14
  text "TOLERANCE:" at 106.548,22.257 h1.14
  text "OTHER +/-" at 177.541,22.257 h1.14
  text "X" at 121.788,22.13 h1.14
  text "IN A/W IPC-D-300G CLASS" at 125.001,22.057 h1.14
  text "2" at 153.499,19.31 h1.14
  text "BOW & TWIST:" at 106.535,19.209 h1.14
  text "AS SHOWN" at 177.668,19.082 h1.14
  text "IN A/W IPC-D-300G CLASS" at 125.001,19.009 h1.14
  text "X" at 121.788,18.955 h1.14
  text "COPPER THICKNESS (FINISHED)" at 104.099,16.21 h1.14
  text "18um" at 124.455,13.621 h1.14
  text "35um" at 151.506,13.621 h1.14
  text "70um" at 177.795,13.621 h1.14
  text "OUTER:" at 107.699,13.51 h1.14
  text "X" at 148.763,13.418 h1.14
  text "18um" at 124.455,10.573 h1.14
  text "35um" at 151.506,10.573 h1.14
  text "70um" at 177.795,10.573 h1.14
  text "INNER SIGNAL:" at 107.699,10.51 h1.14
  text "X" at 148.712,10.37 h1.14
  text "INNER PWR:" at 107.699,7.51 h1.14
  text "18um" at 124.455,7.525 h1.14
  text "35um" at 151.506,7.525 h1.14
  text "70um" at 177.795,7.525 h1.14
  text "X" at 148.839,7.398 h1.14
  text "STRUCTURE:" at 98.801,4.477 h1.14
  text "REFER" at 124.455,4.477 h1.14
  text "AS PER DRAWING No." at 124.328,1.302 h1.14
  text "AS SHOWN" at 177.668,1.302 h1.14
  text "X" at 175.128,1.175 h1.14
  text "DRILLING:" at 98.801,-1.492 h1.14
  text "COMPONENT SIDE" at 124.455,-3.778 h1.14
  text "SOLDER SIDE" at 151.252,-3.778 h1.14
  text "VIEWED FROM:" at 105.799,-3.99 h1.14
  text "X" at 121.788,-4.032 h1.14
  text "REFERENCE:" at 106.04,-6.826 h1.14
  text "AS SHOWN" at 124.328,-6.953 h1.14
  text "PATTERN MASTER LIST" at 151.379,-6.953 h1.14
  text "X" at 175.128,-6.953 h1.14
  text "NC_DRILL FILES" at 177.668,-6.953 h1.14
  text "X" at 121.788,-7.08 h1.14
  text "20um" at 151.506,-9.874 h1.14
  text "PTH MINIMUM COPPER THICKNESS:" at 106.099,-9.99 h1.14
  text "X" at 148.839,-10.001 h1.14
  text "OTHER" at 177.668,-10.001 h1.14
  text "NPTH:" at 105.999,-12.89 h1.14
  text "TENTED" at 124.328,-13.049 h1.14
  text "X" at 148.839,-13.049 h1.14
  text "PADS REMOVED" at 151.379,-13.049 h1.14
  text "REMOVE PADS" at 177.668,-13.049 h1.14
  text "X" at 121.788,-13.176 h1.14
  text "2nd DRILL" at 124.328,-16.097 h1.14
  text "BOTH" at 151.379,-16.097 h1.14
  text "AS SHOWN" at 163.698,-16.097 h1.14
  text "NONE" at 177.668,-16.097 h1.14
  text "BOARD FINISH:" at 98.801,-19.018 h1.14
  text "X" at 121.788,-19.145 h1.14
  text "ETCHING" at 124.328,-19.145 h1.14
  text "REFER PATTERN MASTER LIST" at 151.379,-19.145 h1.14
  text "LEGEND / SCREEN PRINT:" at 105.199,-22.09 h1.14
  text "NONE" at 132.801,-22.082 h1.14
  text "COMPONENT" at 151.376,-22.117 h1.14
  text "SOLDER" at 177.701,-22.182 h1.14
  text "X" at 148.836,-22.244 h1.14
  text "X" at 175.161,-22.309 h1.14
  text "WHITE" at 124.401,-24.982 h1.14
  text "COLOUR:" at 111.099,-25.09 h1.14
  text "X" at 121.861,-25.109 h1.14
  text "YELLOW" at 151.379,-25.241 h1.14
  text "OTHER" at 177.668,-25.241 h1.14
  text "SOLDER RESIST:" at 104.999,-28.29 h1.14
  text "X" at 121.788,-28.289 h1.14
  text "LIQUID PHOTOIMAGEABLE" at 124.328,-28.289 h1.14
  text "SCREEN PRINT" at 163.698,-28.289 h1.14
  text "FINISH:" at 111.399,-31.29 h1.14
  text "MATTE" at 124.328,-31.337 h1.14
  text "GLOSS" at 137.028,-31.337 h1.14
  text "X" at 134.361,-31.464 h1.14
  text "COLOUR:" at 111.099,-34.29 h1.14
  text "BLACK" at 124.328,-34.385 h1.14
  text "GREEN" at 137.028,-34.385 h1.14
  text "YELLOW" at 151.379,-34.385 h1.14
  text "BLUE" at 163.698,-34.385 h1.14
  text "OTHER" at 177.668,-34.385 h1.14
  text "X" at 121.661,-34.512 h1.14
  text "TRACK FINISH:" at 98.801,-37.306 h1.14
  text "SELECTIVE SOLDER (HASL)" at 124.328,-37.433 h1.14
  text "REFLOW SOLDER" at 163.698,-37.433 h1.14
  text "0.1um - 0.2um ELECTROLESS GOLD OVER 3um NICKEL" at 124.4,-40.29 h1.14
  text "X" at 121.799,-40.39 h1.14
  text "IMMERSION GOLD" at 124.328,-43.529 h1.14
  text "OTHER" at 163.698,-43.529 h1.14
  text "BOARD EDGES ARE ROUNDED AS SHOWN" at -116.684,-46.03 h3.81
  text "EDGE BOARD" at 98.801,-46.45 h1.14
  text "1.3um HARD GOLD OVER 5um     NICKEL / TIN-NICKEL" at 124.328,-46.577 h1.14
  text "CONTACTS:" at 98.801,-48.609 h1.14
  text "HARD FINISH GOLDE PLATE" at 124.328,-49.625 h1.14
  text "OTHER" at 163.698,-49.625 h1.14
  text "AS SHOWN" at 124.328,-52.673 h1.14
  text "REFER" at 163.698,-52.673 h1.14
  text "PROFILING:" at 98.801,-55.721 h1.14
  text "AS DIMENSIONED, MEASURED AND CUT FROM SPECIFIED DATUM." at 124.328,-55.721 h1.14
  text "X" at 121.788,-55.848 h1.14
  text "REFER PCB BLANK DWG No." at 124.455,-58.642 h1.14
  text "USE PROFILE / ROUTE TAPE SUPPLIED (REFER PATTERN MASTER LIST)" at 124.455,-61.69 h1.14
  text "SQUARE CUT" at 124.455,-64.738 h1.14
  text "X" at 139.441,-64.738 h1.14
  text "N.C. ROUTE" at 142.235,-64.738 h1.14
  text "V. SCORE" at 160.015,-64.738 h1.14
  text "BLANK" at 177.795,-64.738 h1.14
  text "ACCEPTABILITY:" at 98.801,-67.405 h1.14
  text "MATERIALS AND WORKMANSHIP FOR ALL PRINTED WIRING BOARDS TO MEET" at 121.026,-67.532 h1.14
  text "OR EXCEED THE REQUIREMENTS OF:" at 121.026,-70.326 h1.14
  text "NANOBOARD NB2DSK-SPK" at -118.242,-72.739 h6.35
  text "IPC-6011/12 AND IPC-A-600E" at 124.582,-72.993 h1.14
  text "1" at 160.142,-72.993 h1.14
  text "2" at 169.032,-72.993 h1.14
  text "3" at 177.928,-73.055 h1.14
  text "X" at 166.365,-73.12 h1.14
  text "X" at 121.915,-73.247 h1.14
  text "UL CERTIFICATION" at 124.582,-76.041 h1.14
  text "AUSTEL" at 160.142,-76.041 h1.14
  text "X" at 121.915,-76.168 h1.14
  text "ML-P-55110F GRP" at 124.074,-79.089 h1.14
  text "A" at 142.362,-79.089 h1.14
  text "B" at 151.252,-79.089 h1.14
  text "AS2546" at 160.142,-79.089 h1.14
  text "OTHER" at 177.922,-79.089 h1.14
  text "ADDITIONAL REQUIREMENTS:" at 98.6,-82.39 h1.14
  text "REV.07" at -77.475,-83.026 h6.35
  text "NONE" at 124.548,-84.968 h1.14
  text "SAMPLE PLAN" at 142.328,-84.968 h1.14
  text "MIL-P-55110E SERIAL Nos. PER ORDER" at 162.108,-84.968 h1.14
  text "X" at 121.849,-84.983 h1.14
  text "MICROSECTION:" at 103.799,-85.09 h1.14
  text "NONE" at 124.643,-88.156 h1.14
  text "CERTIFICATION:" at 103.699,-88.29 h1.14
  text "A" at 162.062,-88.389 h1.14
  text "MIL-P-55110E GRP" at 142.218,-88.439 h1.14
  text "B" at 167.428,-88.468 h1.14
  text "1" at 192.129,-88.568 h1.14
  text "2" at 197.495,-88.647 h1.14
  text "3" at 202.995,-88.647 h1.14
  text "IPC CLASS:" at 177.719,-88.739 h1.14
  text "RoHS Compliant" at 124.643,-91.356 h1.14
  text "X" at 121.849,-91.483 h1.14
  text "X" at 139.587,-91.572 h1.14
  text "QUALITY RELEASE REPORT" at 142.218,-91.639 h1.14
  text "OTHER" at 177.822,-91.689 h1.14
  text "NONE" at 124.588,-94.568 h1.14
  text "REQUIRED (100% NETS & PADS)" at 142.368,-94.568 h1.14
  text "ELECTRICAL TEST:" at 103.699,-94.69 h1.14
  text "X" at 139.701,-94.695 h1.14
  text "PER ORDER" at 177.922,-94.71 h1.14
  text "2 SIDES" at 161.744,-97.755 h1.14
  text "MIN. PITCH" at 177.828,-97.755 h1.14
  text "0.6mm" at 191.417,-97.755 h1.14
  text "NONE" at 124.588,-97.768 h1.14
  text "1 SIDE" at 142.241,-97.768 h1.14
  text "SURFACE MOUNT:" at 103.599,-97.89 h1.14
  text "X" at 139.475,-98.1 h1.14
  text "FOIL" at 162.148,-100.908 h1.14
  text "NONE" at 142.368,-101.008 h1.14
  text "LEGEND" at 170.879,-101.008 h1.14
  text "REFER" at 182.881,-101.008 h1.14
  text "Bottom Overlay" at 191.006,-100.994 h1.14
  text "X" at 168.187,-101.047 h1.14
  text "X" at 180.187,-101.047 h1.14
  text "MANUFACTURER'S ID/LOGO:" at 103.599,-101.29 h1.14
  text "NONE" at 162.199,-104.09 h1.14
  text "ISO9001/AS3901" at 142.388,-104.268 h1.14
  text "MANUFACTURER'S ACCREDITATION:" at 103.599,-104.39 h1.14
  text "X" at 139.721,-104.395 h1.14
  text "PACKAGING AND HANDLING:" at 103.599,-107.19 h1.14
  text "REFER" at 162.148,-107.404 h1.14
  text "PER ORDER" at 142.368,-107.504 h1.14
  text "X" at 139.701,-107.758 h1.14
  text "Notes" at 95.999,-115.19 h1.14
  text "1. All dimensions are in mm. The router cutter diameter is 2.4mm." at 97.669,-121.02 h1.14
Drill Drawing:
  text ".Legend" at -183.45,91.025 h1.52

## Text inside footprints (layer, text, board x,y; h text height)
Q1: 2. Gerber ID "dfn-8" at 29.079,33.646 h1.52 r270